# EAGLE board lightmeter_initiallayout (EAGLE 6.6.0)

Size 50.47 x 59.68 mm. Coordinates in mm from the lower left corner, seen from the top.
Outline: 0,0 50.47,0 50.47,59.68 0,59.68 0,0
Copper layers (1*16): Top 0.035mm / dielectric 1.5mm / Bottom 0.035mm
Design rules "default": minimum track width 10mil, minimum drill 24mil, track to track 8mil, track to pad 8mil, pad to pad 8mil, via to via 8mil, smd to smd 8mil, copper to edge 40mil, drill to drill 8mil, minimum pad ring 10mil, minimum via ring 8mil, stop-mask expansion 4mil, vias tented up to drill 0mil, thermal gap 10mil

## Footprints (pad centres in the part's own frame; a part is rotated, then mirrored left to right if it is on the bottom)
12BH412 = drill 1 pad 2.54: + 22.5,0; - -22.5,0
C1206 = smd 1.6 x 1.8: 1 -1.4,0; 2 1.4,0
DO41Z10 = drill 1.118: A 5.08,0; C -5.08,0
SOD323-W = smd 1.5 x 1.2: A 1.45,0; C -1.45,0
SOT23-6L = smd 0.55 x 1.2: 1 -0.95,-1.3; 2 0,-1.3; 3 0.95,-1.3; 4 0.95,1.3; 5 0,1.3; 6 -0.95,1.3
TSSOP14 = smd 0.305 x 0.991: 1 -1.95,-2.918; 2 -1.3,-2.918; 3 -0.65,-2.918; 4 0,-2.918; 5 0.65,-2.918; 6 1.3,-2.918; 7 1.95,-2.918; 8 1.95,2.918; 9 1.3,2.918; 10 0.65,2.918; 11 0,2.918; 12 -0.65,2.918; 13 -1.3,2.918; 14 -1.95,2.918
MSOP08 = smd 0.4 x 1: 1 -0.976,-2.263; 2 -0.326,-2.263; 3 0.324,-2.263; 4 0.974,-2.263; 5 0.974,2.262; 6 0.324,2.262; 7 -0.326,2.262; 8 -0.976,2.262
R1206 = smd 1.6 x 1.803: 1 -1.422,0; 2 1.422,0
SOT23 = smd 1 x 1.4: 1 -0.95,-1.1; 2 0.95,-1.1; 3 0,1.1
1206 = smd 1.6 x 1.8: 1 -1.4,0; 2 1.4,0
SKHMPXE010 = smd 1.6 x 1.4: 1 -4.2,2.25; 2 4.2,2.25; 3 -4.2,-2.25; 4 4.2,-2.25; 5 4.2,0
B1,27 = smd 1.27 x 1.27: TP 0,0
MLF20 = smd 0.9 x 0.35: 1 -2.25,1.3; 2 -2.25,0.65; 3 -2.25,0; 4 -2.25,-0.65; 5 -2.25,-1.3; 11 2.25,-1.3; 12 2.25,-0.65; 13 2.25,0; 14 2.25,0.65; 15 2.25,1.3 | smd 0.35 x 0.9: 6 -1.3,-2.25; 7 -0.65,-2.25; 8 0,-2.25; 9 0.65,-2.25; 10 1.3,-2.25; 16 1.3,2.25; 17 0.65,2.25; 18 0,2.25; 19 -0.65,2.25; 20 -1.3,2.25 | smd 2.54 x 2.54: GND 0,0
UG-2864HSWEG01_0.96IN_WRAPAROUND = smd 0.35 x 2.2 bottom: 1 -10.15,-1.2; 2 -9.45,-1.2; 3 -8.75,-1.2; 4 -8.05,-1.2; 5 -7.35,-1.2; 6 -6.65,-1.2; 7 -5.95,-1.2; 8 -5.25,-1.2; 9 -4.55,-1.2; 10 -3.85,-1.2; 11 -3.15,-1.2; 12 -2.45,-1.2; 13 -1.75,-1.2; 14 -1.05,-1.2; 15 -0.35,-1.2; 16 0.35,-1.2; 17 1.05,-1.2; 18 1.75,-1.2; 19 2.45,-1.2; 20 3.15,-1.2; 21 3.85,-1.2; 22 4.55,-1.2; 23 5.25,-1.2; 24 5.95,-1.2; 25 6.65,-1.2; 26 7.35,-1.2; 27 8.05,-1.2; 28 8.75,-1.2; 29 9.45,-1.2; 30 10.15,-1.2 | hole 0.4: -8,-5.45; 8,-5.45

## Placement (x,y rotation side)
BATT1  AAA  [12BH412]  25.4,26.67 0 top
C1  µ1  [C1206]  17.78,38.1 0 top
C2  4µ7  [C1206]  24.13,21.59 0 top
C3  4µ7  [C1206]  24.76,29.21 0 top
C4  µ1  [C1206]  35.56,46.99 90 top
C5  µ1  [C1206]  12.7,29.21 270 top
C6  4µ7  [C1206]  24.13,48.26 0 top
C7  2µ2  [C1206]  38.1,49.53 90 top
C8  2µ  [C1206]  21.59,55.88 90 top
C9  2µ  [C1206]  12.7,55.88 90 top
C10  µ1  [C1206]  12.7,49.53 90 top
D1  1N4728  [DO41Z10]  30.48,52.07 0 top
D2  [SOD323-W]  17.14,55.88 0 top
D3  [SOD323-W]  17.14,53.34 0 top
D4  [SOD323-W]  17.14,50.8 0 top
D5  [SOD323-W]  38.1,8.89 90 top
D6  [SOD323-W]  12.7,16.51 90 top
D7  [SOD323-W]  14.61,16.51 90 top
D8  [SOD323-W]  35.56,8.89 90 top
IC$1  TI-TLV61220  [SOT23-6L]  24.13,25.4 270 top
IC$2  SN74HC164TSSOP-14  [TSSOP14]  17.78,30.48 270 top
IC$3P  AD8542RM  [MSOP08]  30.48,46.99 270 top
INDUCTOR$1  4.7µH  [R1206]  19.05,24.13 90 top
Q1  BSS123  [SOT23]  12.7,40.64 0 top
Q2  BSS123  [SOT23]  36.83,55.88 0 top
Q3.6  BSS123  [SOT23]  38.1,33.02 0 top
Q4.7  BSS123  [SOT23]  38.1,38.1 0 top
Q5.8  BSS123  [SOT23]  24.13,36.83 0 top
Q6.9  BSS123  [SOT23]  38.1,43.18 0 top
Q7.10  BSS123  [SOT23]  24.13,43.18 0 top
R1  1M  [R1206]  13.97,24.13 0 top
R2  220k  [R1206]  13.97,21.59 0 top
R3  10k  [R1206]  31.75,55.88 0 top
R4  10k  [R1206]  12.7,35.56 90 top
R5  530k  [1206]  26.04,55.88 0 top
R6  1k  [R1206]  30.48,33.02 0 top
R7  22k  [R1206]  30.48,35.56 0 top
R8  330k  [R1206]  30.48,38.1 0 top
R9  1M  [R1206]  30.48,40.64 0 top
R10  3.3M  [R1206]  30.48,43.18 0 top
S1  SKHMPSE010  [SKHMPXE010]  33.02,26.67 0 top
S2  SKHMPSE010  [SKHMPXE010]  21.59,16.51 0 top
S3  SKHMPSE010  [SKHMPXE010]  33.02,16.51 0 top
S4  SKHMPSE010  [SKHMPXE010]  17.78,7.62 0 top
S5  SKHMPSE010  [SKHMPXE010]  29.21,7.62 0 top
TGND  TPB1,27  [B1,27]  10.16,27.94 0 top
TMISO  TPB1,27  [B1,27]  10.16,46.99 0 top
TMOSI  TPB1,27  [B1,27]  10.16,31.75 0 top
TRST  TPB1,27  [B1,27]  10.16,39.37 0 top
TSCK  TPB1,27  [B1,27]  10.16,43.18 0 top
TSDBG  TPB1,27  [B1,27]  10.16,52.07 0 top
TVTG  TPB1,27  [B1,27]  10.16,35.56 0 top
U$1  ATTINY1634MLF20  [MLF20]  17.78,43.18 0 top
U$4  [UG-2864HSWEG01_0.96IN_WRAPAROUND]  25.4,54.61 180 top

## Library data of the parts
BATT1 = adafruit
C1-C10 = rcl
D1 = diode
D2-D8 = diode2
IC$1 = custom
IC$2 = lightmeter
IC$3P = analog-devices; MPN: AD8542ARZ; OC_FARNELL: 1464965; OC_NEWARK: 19M0965
INDUCTOR$1 R1-R4 R6-R10 = resistor
Q1 Q2 Q3.6 Q4.7 Q5.8 Q6.9 Q7.10 = transistor-small-signal
R5 U$4 = microbuilder
S1-S5 = switch
TGND TMISO TMOSI TRST TSCK TSDBG TVTG = testpad
U$1 = attiny1634

## Nets
AVRMISO: TMISO.TP U$1.17
AVRMOSI: TMOSI.TP U$1.18
AVRRST: TRST.TP U$1.12
AVRSCK: TSCK.TP U$1.14
CPCLK1: C8.2 U$1.1
CPCLK2: C9.2 U$1.16
CPOUT: C10.1 D4.C U$4.28
GND: BATT1.- C1.2 C2.1 C3.2 C5.1 C7.2 C10.2 D1.A IC$1.2 IC$2.7 IC$3P.5 Q1.2 Q2.2 R2.1 R3.2 R4.1 R5.2 S1.3 S2.3 S3.3 S4.3 S5.3 TGND.TP U$1.8 U$1.GND
N$1: IC$1.1 INDUCTOR$1.2
N$2: C6.2 D1.C IC$3P.6 Q3.6.3 Q4.7.3 Q5.8.3 Q6.9.3 Q7.10.3
N$3: Q5.8.2 R8.2
N$4: Q6.9.2 R9.2
N$5: Q3.6.2 R6.2
N$6: C4.2 IC$3P.4 Q2.3
N$7: D6.C D7.C S4.1
N$8: D5.C D8.C S5.1
N$9: Q7.10.2 R10.2
N$10: IC$1.4 R1.2 R2.2
N$16: C8.1 D2.C D3.A
N$17: C9.1 D3.C D4.A
N$19: R5.1 U$4.26
N$23: TSDBG.TP U$1.2
N$25: C7.1 U$4.27
OAOUT: C6.1 IC$3P.7 R6.1 R7.1 R8.1 R9.1 R10.1 U$1.15
OAPWR: IC$2.10 Q2.1 R3.1
PBI$1: D5.A S1.1 U$1.4
PBI$2: D7.A D8.A S2.1 U$1.5
PBI$3: D6.A S3.1 U$1.13
SCRCLK: U$1.10 U$4.18
SCRCS: U$1.11 U$4.13
SCRDAT: U$1.19 U$4.19
SCRDC: U$1.20 U$4.15
SCRGRND: Q1.3 U$4.1 U$4.8 U$4.10 U$4.11 U$4.12 U$4.29 U$4.30
SCRPWR: IC$2.3 Q1.1 R4.2
SCRRES: IC$2.4 U$1.7 U$4.14
SRA: IC$2.1 IC$2.2 U$1.3
SRCLK: IC$2.8 U$1.6
STG$1: IC$2.5 Q7.10.1
STG$2: IC$2.6 Q6.9.1
STG$3: IC$2.13 Q5.8.1
STG$4: IC$2.12 Q4.7.1
STG$5: IC$2.11 Q3.6.1
VCC: BATT1.+ C2.2 IC$1.3 IC$1.6 INDUCTOR$1.1
VREG: C1.1 C3.1 C4.1 C5.2 D2.A IC$1.5 IC$2.9 IC$2.14 IC$3P.8 R1.1 TVTG.TP U$1.9 U$4.6 U$4.9
X: Q4.7.2 R7.2

## Tracks (layer width: path | path; a pad name or v marks a point on that pad's centre or on a via)
AVRMISO  (1 unrouted)
AVRMOSI  (1 unrouted)
AVRRST  (1 unrouted)
AVRSCK  (1 unrouted)
CPCLK1  (1 unrouted)
CPCLK2  (1 unrouted)
CPOUT  (2 unrouted)
GND  (24 unrouted)
N$1  (1 unrouted)
N$2  (7 unrouted)
N$3  (1 unrouted)
N$4  (1 unrouted)
N$5  (1 unrouted)
N$6  (2 unrouted)
N$7  (2 unrouted)
N$8  (2 unrouted)
N$9  (1 unrouted)
N$10  (2 unrouted)
N$16  (2 unrouted)
N$17  (2 unrouted)
N$19  (1 unrouted)
N$23  (1 unrouted)
N$25  (1 unrouted)
OAOUT  (7 unrouted)
OAPWR  (2 unrouted)
PBI$1  (2 unrouted)
PBI$2  (3 unrouted)
PBI$3  (2 unrouted)
SCRCLK  (1 unrouted)
SCRCS  (1 unrouted)
SCRDAT  (1 unrouted)
SCRDC  (1 unrouted)
SCRGRND  (7 unrouted)
SCRPWR  (2 unrouted)
SCRRES  (2 unrouted)
SRA  (2 unrouted)
SRCLK  (1 unrouted)
STG$1  (1 unrouted)
STG$2  (1 unrouted)
STG$3  (1 unrouted)
STG$4  (1 unrouted)
STG$5  (1 unrouted)
VCC  (4 unrouted)
VREG  (13 unrouted)
X  (1 unrouted)